# Altium PCB PCB1.PcbDoc
Units mil, origin at the board's own origin, x right, y up, seen from the top; angles counter-clockwise.
Board outline 6000 x 4000 mil, 2 copper layers (Top Layer, Bottom Layer); 54 components, 62 nets, 232 pads, 0 vias.
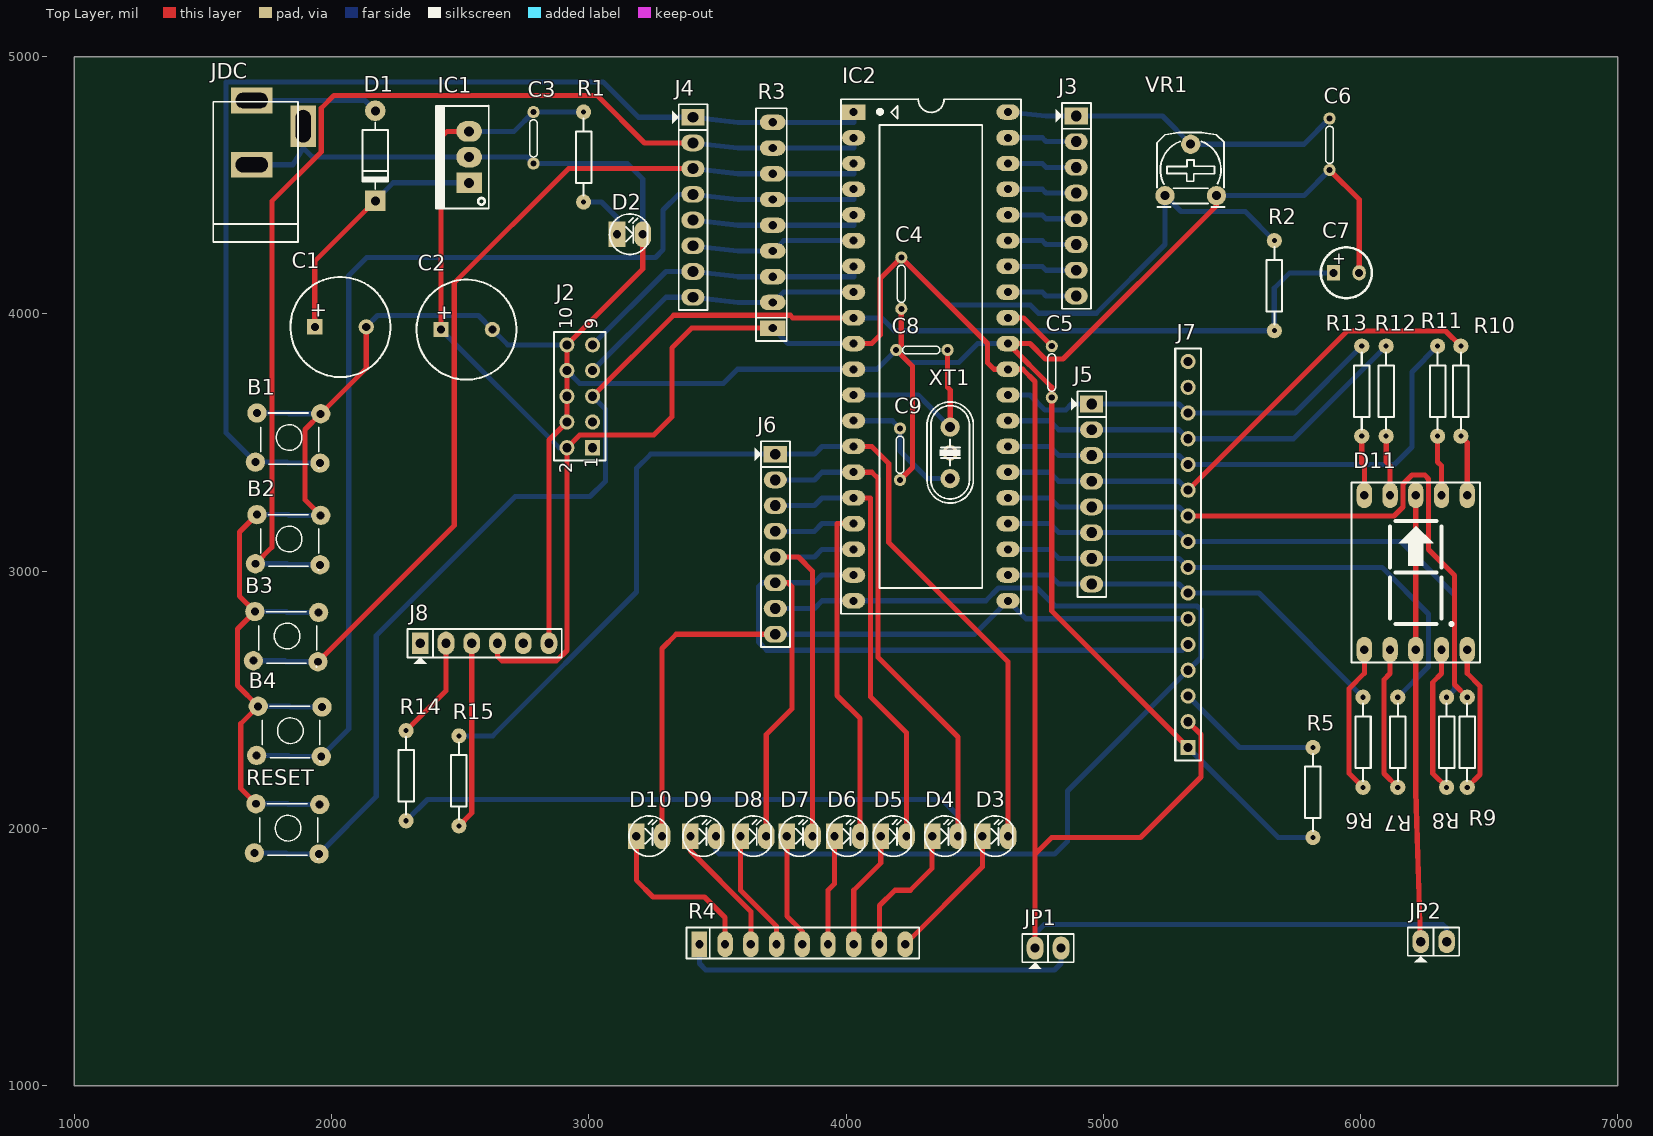
[diagram p0: Top Layer view]
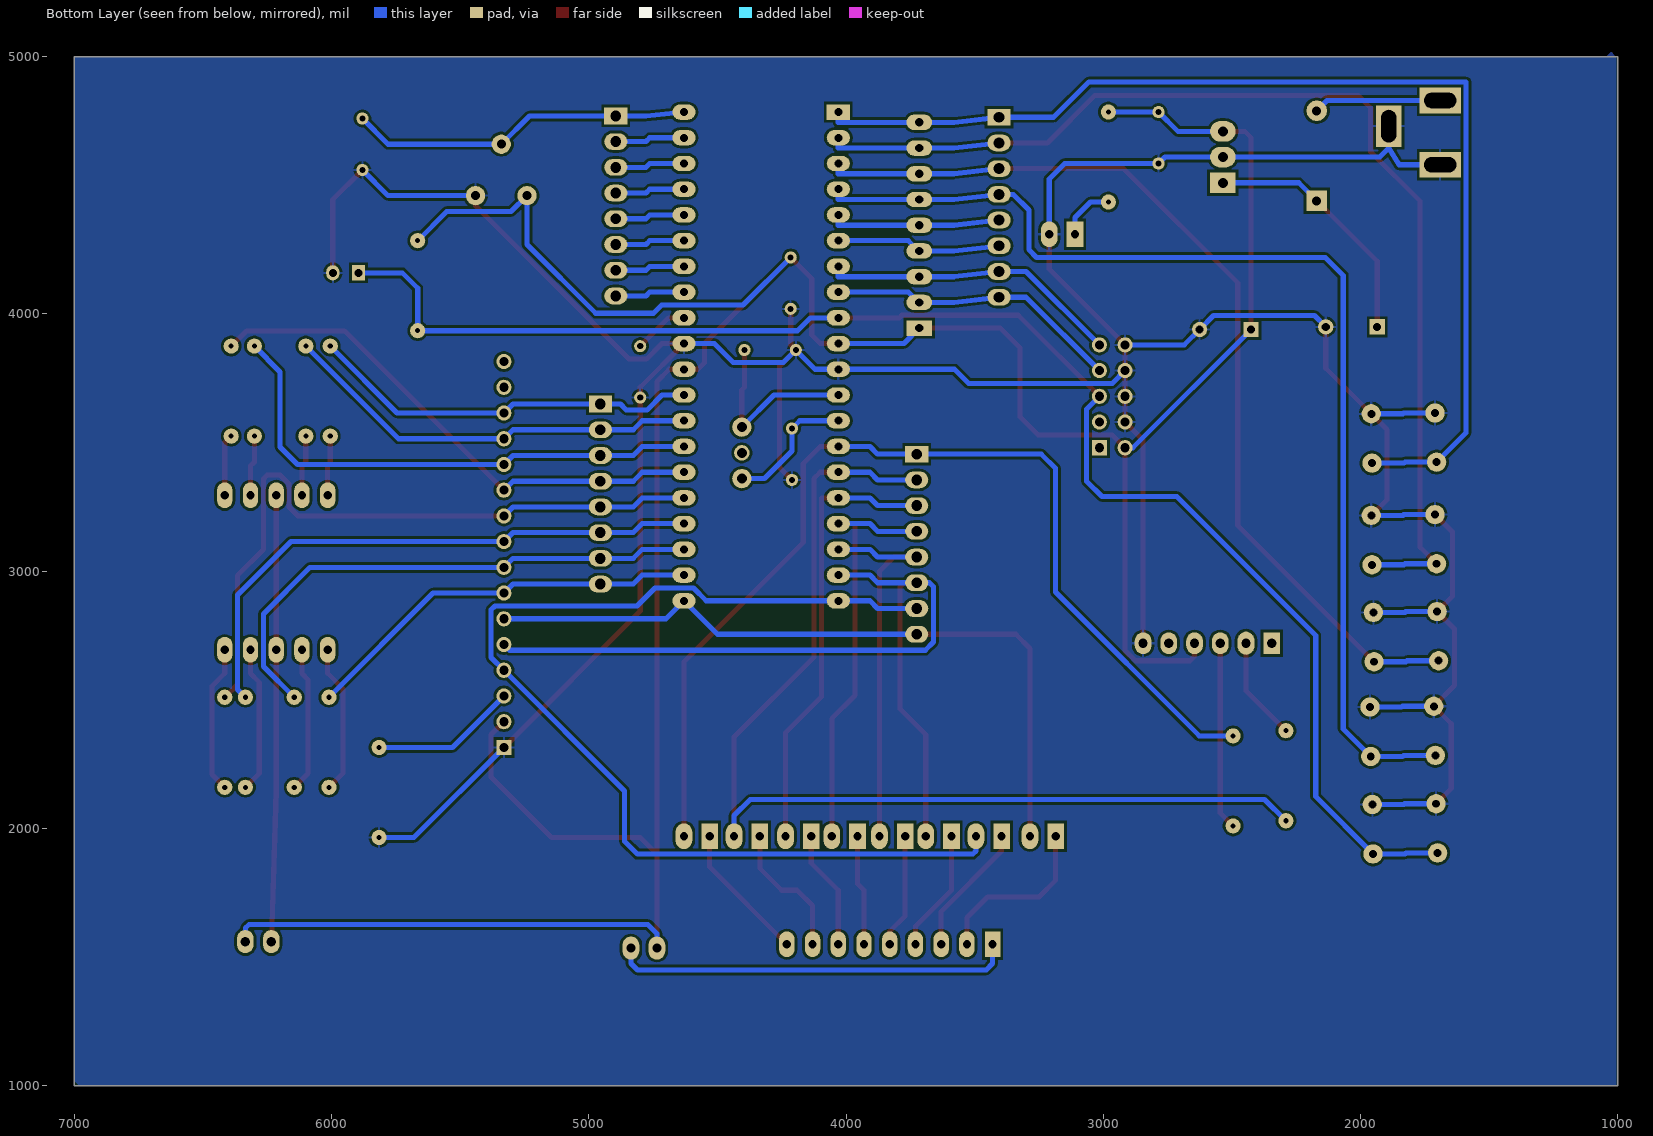
[diagram p1: Bottom Layer view, seen from below]
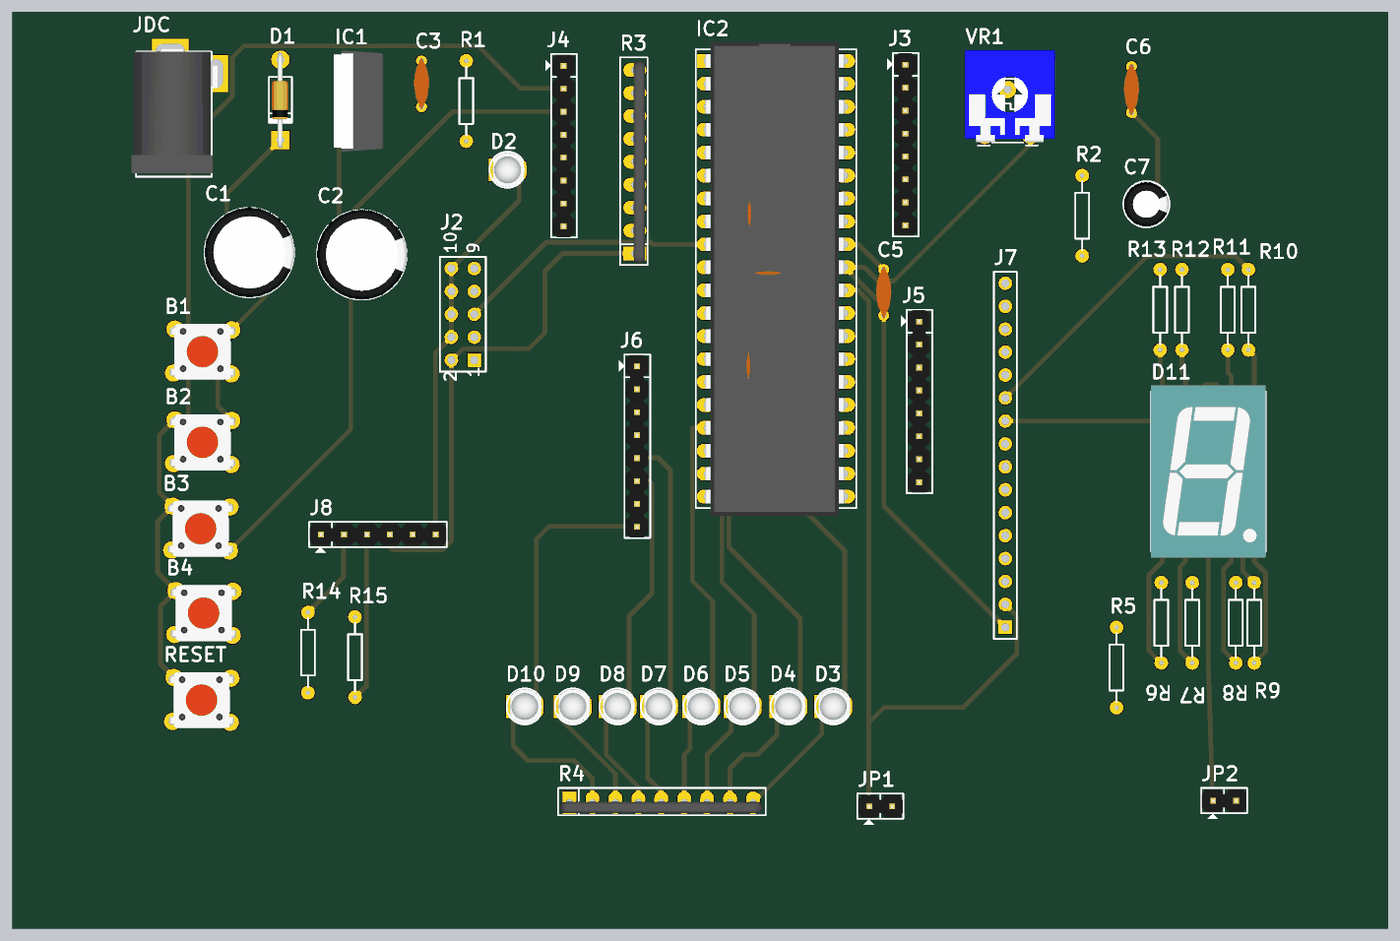
[diagram p2: 3D render of the assembled board from above, using the file's embedded part models]

## Layer stack, top to bottom
Top Solder: solder mask 0.4, Solder Resist, Dk 3.5
Top Layer: signal copper 1.4
Dielectric 1: dielectric 12.6, FR-4, Dk 4.8
Bottom Layer: signal copper 1.4
Bottom Solder: solder mask 0.4, Solder Resist, Dk 3.5

## Board outline
1000,1000 7000,1000 7000,5000 1000,5000

## Design rules (kind name [scope] priority, off if disabled: settings)
Clearance [All] p1: gap=10 ignorepadtopadclearanceinfootprint=FALSE except(0: Arc-Hole Track-Hole SMDPad-Hole THPad-Hole Via-Hole Fill-Hole Poly-Hole Region-Hole Text-Hole)
PolygonConnect [All] p1: connectstyle=Relief reliefconductorwidth=10 reliefentries=4 polygonreliefangle="90 Angle" airgapwidth=10
RoomDefinition mach_nguyen_ly [InComponentClass('mach_nguyen_ly')] p1: confinementstyle=ConfineIn formatcopy=TRUE lockcomponents=FALSE outline 7045,1060 20675,1060 20675,3240 7045,3240
RoutingVias [All] p1: holewidth=28 width=50 viastyle="Through Hole" minholewidth=28 minwidth=50 maxholewidth=28 maxwidth=50
SolderMaskExpansion [All] p1: expansion=4 istentingtop=FALSE
Width [All] p1: maxlimit=30 minlimit=15 preferedwidth=20
30 further rules are at their usual default settings.

## Components (designator, comment, footprint, x,y, rotation, side; value= is the part's Value field where it differs from the comment)
B1 "SW" SW4 1710,3615 r0 top value="Button chip 4 pin"
B2 "SW" SW4 1710,3220 r0 top value="Button chip 4 pin"
B3 "SW" SW4 1702,2843 r0 top value="Button chip 4 pin"
B4 "SW" SW4 1715,2475 r0 top value="Button chip 4 pin"
C1 "1000uF" C10mm 2035,3950 r0 top
C2 "1000uF" C10mm 2525,3940 r0 top
C3 "Capacitor Ceramic" Tu-ceramic 2785,4585 r90 top value=100n
C4 "Capacitor Ceramic" Tu-ceramic 4215,4020 r90 top value=100n
C5 "Capacitor Ceramic" Tu-ceramic 4800,3675 r90 top value=100n
C6 "Capacitor Ceramic" Tu-ceramic 5880,4560 r90 top value=100n
C7 "10u" C5mm 5945,4160 r0 top
C8 "Capacitor Ceramic" Tu-ceramic 4195,3860 r0 top value=22p
C9 "Capacitor Ceramic" Tu-ceramic 4210,3355 r90 top value=22p
D1 "1N4007" D1A 2170,4790 r90 top
D2 "LED 5mm" LED-3 3110,4310 r0 top value="LED 3 ly Single Colour"
D3 "LED 5mm" LED-3 4530,1970 r0 top value="LED 3 ly Single Colour"
D4 "LED 5mm" LED-3 4335,1970 r0 top value="LED 3 ly Single Colour"
D5 "LED 5mm" LED-3 4135,1970 r0 top value="LED 3 ly Single Colour"
D6 "LED 5mm" LED-3 3955,1970 r0 top value="LED 3 ly Single Colour"
D7 "LED 5mm" LED-3 3770,1970 r0 top value="LED 3 ly Single Colour"
D8 "LED 5mm" LED-3 3590,1970 r0 top value="LED 3 ly Single Colour"
D9 "LED 5mm" LED-3 3395,1970 r0 top value="LED 3 ly Single Colour"
D10 "LED 5mm" LED-3 3185,1970 r0 top value="LED 3 ly Single Colour"
D11 "7SEG S" 7SEGS 6015,2695 r0 top value="LED 7S SEG"
IC1 "LM7805" QTO-220 2535,4510 r90 top
IC2 "ATMEL 16L" DIP40/W0.6 4030,4785 r270 top value="Atmega 16L"
J2 "Header 5X2" HDR2X5 3015,3480 r90 top
J3 "PA" JP8 4895,4770 r270 top value=JP7
J4 "PB" JP8 3405,4765 r270 top value=JP7
J5 "PC" JP8 4955,3650 r270 top value=JP7
J6 "PD" JP8 3725,3455 r270 top value=JP7
J7 "Header 16" HDR1X16 5330,2315 r90 top
J8 "UART_USB" JP6 2345,2720 r0 top value=JP7
JDC "Jac DC" DC-IN 1790,4705 r90 top
JP1 "Jumper 2" JP2 4735,1535 r0 top value="JP 2"
JP2 "Jumper 2" JP2 6234,1560 r0 top value="JP 2"
R1 "1K" R1/6W 2980,4610 r90 top value="R1/4W - 1K"
R2 "10K" R1/6W 5665,4110 r90 top value="R1/4W - 1K"
R3 "10K" RN8 3715,3945 r90 top value="Tro thanh 10K"
R4 "1K" RN8 3430,1550 r0 top value="Tro thanh 10K"
R5 "1K" R1/6W 5815,2140 r90 top value="R1/4W - 1K"
R6 "1k" R1/6W 6010,2335 r270 top value="R1/4W - 1K"
R7 "1k" R1/6W 6145,2335 r270 top value="R1/4W - 1K"
R8 "1k" R1/6W 6335,2335 r270 top value="R1/4W - 1K"
R9 "1k" R1/6W 6415,2335 r270 top value="R1/4W - 1K"
R10 "1k" R1/6W 6390,3700 r270 top value="R1/4W - 1K" (schematic designator 10)
R11 "1k" R1/6W 6300,3700 r270 top value="R1/4W - 1K"
R12 "1k" R1/6W 6100,3700 r270 top value="R1/4W - 1K"
R13 "1k" R1/6W 6005,3700 r270 top value="R1/4W - 1K"
R14 "100R" R1/6W 2290,2205 r90 top value="R1/4W - 1K"
R15 "100R" R1/6W 2495,2185 r270 top value="R1/4W - 1K"
RESET "SW" SW4 1706,2096 r0 top value="Button chip 4 pin"
VR1 "10K" VR 5240,4460 r0 top value="VR 10K"
XT1 "8Mhz" XT2 4405,3460 r270 top value=4Mhz

## Footprints (in the part's own frame and the unit in brackets; to place one, negate y for a bottom-side part, rotate by r counter-clockwise, add the part's x,y. Pads: shape width x height; smd on the part's side, far side on the other; paste and mask are expansions set on the pad)
7SEGS [mil] "DIP 10 Leads; Body 12 x 15 mm; Pitch 0.5 mm"
  oval 60x100 hole 32: 1(0,0) 2(100,0) 3(200,0) 4(300,0) 5(400,0) 6(400,600) 7(300,600) 8(200,600) 9(100,600) 10(0,600)
  silkscreen extent -50,-50 450,650, body extent -50,-75 450,675, height 316
C5mm [mm]
  rect 1.3x1.5 hole 0.8: 1(-1.27,0)
  oval 1.3x1.5 hole 0.8: 2(1.27,0)
  silkscreen extent -2.51,-2.51 2.51,2.51, body extent -2.5,-2.5 2.49,2.5, height 11.01
C10mm [mm]
  rect 1.5x1.5 hole 0.8: 1(-2.54,0)
  round 1.5 hole 0.8: 2(2.54,0)
  silkscreen extent -4.95,-4.96 4.93,4.92, body extent -5,-5 4.97,5, height 20.01
D1A [mil] "Diode 1A, W 100mil, L 350mil"
  round 80 hole 35: 1(0,0)
  rect 80x80 hole 35: 2(-350,0)
  silkscreen extent -305,-50 -45,50, body extent -386,-33 34,36, height 84
DC-IN [mil] "Jac DC input"
  rect 100x160 hole 59.06 slot 125.98 at 90 deg: 1(125,100) 2(-125,100)
  rect 160x100 hole 59.06 slot 125.98 at 0 deg: 3(25,-100)
  silkscreen extent -425,-80 120,250, body extent -410,-105 134,269, height 434
DIP40/W0.6 [mil] "40 PIN, W 600mil, Pin to pin 100mil"
  rect 60x90 hole 31: 1(0,0)
  oval 60x90 hole 31: 2(100,0) 3(200,0) 4(300,0) 5(400,0) 6(500,0) 7(600,0) 8(700,0) 9(800,0) 10(900,0) 11(1000,0) 12(1100,0) 13(1200,0) 14(1300,0) 15(1400,0) 16(1500,0) 17(1600,0) 18(1700,0) 19(1800,0) 20(1900,0) 21(1900,600) 22(1800,600) 23(1700,600) 24(1600,600) 25(1500,600) 26(1400,600) 27(1300,600) 28(1200,600) 29(1100,600) 30(1000,600) 31(900,600) 32(800,600) 33(700,600) 34(600,600) 35(500,600) 36(400,600) 37(300,600) 38(200,600) 39(100,600) 40(0,600)
  silkscreen extent -50,-50 1950,650, body extent -82,-10 1982,600, height 224
HDR1X16 [mm] "Connector; Header; 16 Position"
  rect 1.5x1.5 hole 0.9: 1(0,0)
  round 1.5 hole 0.9: 2(2.54,0) 3(5.08,0) 4(7.62,0) 5(10.16,0) 6(12.7,0) 7(15.24,0) 8(17.78,0) 9(20.32,0) 10(22.86,0) 11(25.4,0) 12(27.94,0) 13(30.48,0) 14(33.02,0) 15(35.56,0) 16(38.1,0)
  silkscreen extent -1.27,-1.27 39.37,1.27
HDR2X5 [mm] "Connector; Header; 5x2 Position"
  rect 1.5x1.5 hole 0.9: 1(0,0)
  round 1.5 hole 0.9: 2(0,2.54) 3(2.54,0) 4(2.54,2.54) 5(5.08,0) 6(5.08,2.54) 7(7.62,0) 8(7.62,2.54) 9(10.16,0) 10(10.16,2.54)
  silkscreen extent -1.27,-1.27 11.43,3.81
JP2 [mil]
  oval 65x90 hole 36: 1(0,0) 2(101,0)
  silkscreen extent -50,-81 150,55, body extent -48,-50 148,48, height 354
JP6 [mil] "JP6"
  rect 65x85 hole 36: 1(0,0)
  oval 65x90 hole 36: 2(100,0)
  oval 65x85 hole 36: 3(200,0) 4(300,0) 5(400,0) 6(500,0)
  silkscreen extent -50,-80 550,55, body extent -48,-50 548,48, height 354
JP8 [mil] "JP8"
  rect 65x90 hole 42: 1(0,0)
  oval 65x90 hole 42: 2(100,0) 3(200,0) 4(300,0) 5(400,0) 6(500,0) 7(600,0) 8(700,0)
  silkscreen extent -50,-80 750,57, body extent -48,-50 748,48, height 354
LED-3 [mil] "LED 2 PIN, 3ly Only colour"
  rect 65x100 hole 32: 1(0,0)
  oval 65x100 hole 32: 2(100,0)
  silkscreen extent -29,-78 118,79, body extent -13,-75 125,75, height 217
QTO-220 [mil] "TO-220 - 1-2-3"
  rect 80x100 hole 39: 1(0,0)
  oval 80x100 hole 39: 2(100,0) 3(200,0)
  silkscreen extent -100,-76 300,130, body extent -121,-85 321,100, height 755
R1/6W [mm]
  round 1.5 hole 0.5: 1(-4.445,0) 2(4.445,0)
  silkscreen extent -3.81,-0.76 3.81,0.76
RN8 [mil] "R SIP8, 9 Pin"
  rect 60x100 hole 32: 1(0,0)
  oval 60x100 hole 32: 2(100,0) 3(200,0) 4(300,0) 5(400,0) 6(500,0) 7(600,0) 8(700,0) 9(800,0)
  silkscreen extent -50,-55 855,65, body extent -43,-44 843,5, height 259
SW4 [mil] "SW button 4pin, 250 x250 mil"
  round 75 hole 31: 1(0,0) 2(245,-195) 3(248,-3) 4(-6,-191)
  silkscreen extent 15,-215 240,0, body extent -36,-220 276,24, height 276
Tu-ceramic [mm] "Tu gom mini"
  round 1.2 hole 0.6: 1(0,0) 2(5.08,0)
  silkscreen extent 0.64,-0.38 4.32,0.38, body extent -0.38,-0.85 5.46,0.85, height 6.12
VR [mil] "Resistor Variable"
  round 75 hole 35: 1(0,0) 2(100,200) 3(200,0)
  silkscreen extent -31,-44 231,246, body extent -87,-30 307,372, height 165
XT2 [mm] "Footpin for Crystal 2 pin"
  round 1.524 hole 1: 0(0,0)
  round 1.905 hole 1: 1(-2.54,0) 2(2.54,0)
  silkscreen extent -5.03,-2.29 4.96,2.29, body extent -5.93,-2.36 5.42,2.29, height 3.5

## Part data
B1 B2 B3 B4 RESET: library part SW4, "Switch button 4 pin"
C1 C2: library part "Cap Pol 12mm", "Polarized Capacitor (Axial)", LatestRevisionDate=17-Jul-2002, LatestRevisionNote="Re-released for DXP Platform.", PackageReference=POLAR0.8, Published=8-Jun-2000, Publisher="Altium Limited"
C3 C4 C5 C6 C8 C9: library part CapDecop, "Capacitor", LatestRevisionDate=17-Jul-2002, LatestRevisionNote="Re-released for DXP Platform.", PackageReference=RAD-0.3, Published=8-Jun-2000, Publisher="Altium Limited"
C7: library part "Cap Pol 5mm", "Polarized Capacitor (Axial)", LatestRevisionDate=17-Jul-2002, LatestRevisionNote="Re-released for DXP Platform.", PackageReference=POLAR0.8, Published=8-Jun-2000, Publisher="Altium Limited"
D1: library part D1A, "Diode 1A"
D2 D3 D4 D5 D6 D7 D8 D9 D10: library part LED, "LED Single colour Green and Red"
D11: library part LED7S, "Single 7 Seg Dipslay"
IC1: library part LM78xx, "On ap +, from + 5 to + 24VDC"
IC2: library part Atmega16L, "8-Bit AVR Microcontroller with 16K Bytes of In-System Programmable Flash Memory"
J2: "Header, 5-Pin, Dual row", LatestRevisionDate=17-Jul-2002, LatestRevisionNote="Re-released for DXP Platform.", Publisher="Altium Limited"
J3 J4 J5 J6: library part JP8, "JP8 PIN"
J7: "Header, 16-Pin", LatestRevisionDate=17-Jul-2002, LatestRevisionNote="Re-released for DXP Platform.", Publisher="Altium Limited"
J8: library part JP6_1, "JP6 PIN"
JDC: library part DCIN, "Jac DC input"
JP1 JP2: library part "JP 2"
R1 R2 R5 R6 R7 R8 R9 R10 R11 R12 R13 R14 R15: library part Res, "Resistor 1/4W"
R3 R4: library part ResN8, "Resistor 8 (Thanh)"
VR1: library part VR1, "Var Resistor"
XT1: library part XT2, "Crystal For all Crystal 2pin."

## Nets (pads, with @x,y where several pads share a name; then routed paths per layer and width w, separated by ;. In a path a pad name is that pad's centre, name@x,y a point inside that pad or via, vN(x,y) a via of type N, cw(c..) or ccw(c..) an arc to the next point about the centre after c; other vN are vias at no path point)
AVR_RX: D3.2 IC2.14 J6.1 R15.1 | length 4087.3
  Top Layer w20: IC2.14 4100,3485 4166,3419 4166,3112 4630,2648 D3.2
  Bottom Layer w20: R15.1 2627,2360 3186,2919 3186,3400 3241,3455 J6.1 3877,3455 3907,3485 IC2.14
AVR_TX: D4.2 IC2.15 J6.2 R14.1 | length 4226.7
  Top Layer w20: IC2.15 4100,3385 4125,3360 4125,2665 4435,2355 D4.2
  Bottom Layer w20: R14.1 2373,2113 4372,2113 4435,2050 D4.2 ; J6.2 3877,3355 3907,3385 IC2.15
FT_RX: J8.2 R14.2 | length 404.2
  Top Layer w20: R14.2 2445,2535 J8.2
FT_TX: J8.3 R15.2 | length 730.7
  Top Layer w20: R15.2 2545,2060 J8.3
GND: B1.1 B1.3 B2.1 B2.3 B3.1 B3.3 B4.1 B4.3 C1.2 C2.2 C3.1 C4.1 C5.1 C6.1 C7.2 C8.1 C9.1 D2.2 IC1.2 IC2.11 IC2.31 J2.4 J2.6 J2.8 J2.10 J7.1 J8.6 JDC.2 JDC.3 R5.1 RESET.1 RESET.3 VR1.3 | length 14985.7
  Top Layer w20: RESET.1 1647,2155 1647,2407 B4.1 1634,2556 1634,2775 B3.1 1642,2903 1642,3152 B2.1 ; B2.3 1897,3278 1897,3551 B1.3 2135,3789 C1.2 ; J8.6 2845,3510 J2.4 J2.6 J2.8 J2.10 3210,4175 D2.2 ; C9.1 4258,3403 4258,3797 C8.1 4215,3880 C4.1 ; J7.1 4800,2845 C5.1 4800,3715 IC2.31 4715,3885 4775,3825 4844,3825 5440,4421 VR1.3 ; C6.1 5995,4445 C7.2
  Bottom Layer w20: JDC.2 1850,4580 1890,4645 ; B3.1 1824,2843 1827,2840 B3.3 ; RESET.1 1828,2096 1831,2093 RESET.3 ; B2.1 1832,3220 1835,3217 B2.3 ; B1.1 1832,3615 1835,3612 B1.3 ; B4.1 1837,2475 1840,2472 B4.3 ; JDC.3 1890,4645 ; C1.2 2179,3994 2571,3994 C2.2 2685,3880 J2.10 ; J2.8 2965,3730 3523,3730 3578,3785 IC2.11 4120,3785 C8.1 4243,3812 4439,3812 4512,3885 IC2.31 ; D2.2 3210,4525 3150,4585 C3.1 2760,4610 IC1.2 1925,4610 1890,4645 ; J7.1 5680,1965 R5.1 ; VR1.3 5780,4460 C6.1
MISO: IC2.7 J2.9 J4.7 R3.3 | length 1174.2
  Bottom Layer w20: J2.9 3300,4165 J4.7 3580,4145 R3.3 4030,4145 IC2.7
MOSI: IC2.6 J4.6 R3.4 | length 642.7
  Bottom Layer w20: J4.6 3580,4245 R3.4 3718,4245 3758,4285 IC2.6
Net10_2: D11.6 R10.2 | length 240.4
  Top Layer w20: R10.2 6415,3500 D11.6
NetC1_1: C1.1 D1.2 IC1.1 | length 981.3
  Top Layer w20: C1.1 1935,4205 D1.2
  Bottom Layer w20: D1.2 2240,4510 IC1.1
NetC5_2: C5.2 IC2.32 | length 215.6
  Top Layer w20: IC2.32 4690,3985 C5.2
NetC8_2: C8.2 IC2.12 XT1.1 | length 730.9
  Top Layer w20: C8.2 4395,3715 4405,3705 XT1.1
  Bottom Layer w20: IC2.12 4280,3685 XT1.1
NetC9_2: C9.2 IC2.13 XT1.2 | length 519.7
  Bottom Layer w20: IC2.13 4180,3585 C9.2 4210,3467 4317,3360 XT1.2
NetD1_1: D1.1 JDC.1 | length 496.6
  Bottom Layer w20: JDC.1 2130,4830 D1.1
NetD2_1: D2.1 R1.1 | length 219.9
  Bottom Layer w20: R1.1 3050,4435 3110,4375 D2.1
NetD3_1: D3.1 R4.9 | length 544.3
  Top Layer w20: R4.9 4530,1850 D3.1
NetD4_1: D4.1 R4.8 | length 540.1
  Top Layer w20: R4.8 4130,1700 4190,1760 4250,1760 4335,1845 D4.1
NetD5_1: D5.1 R4.7 | length 463.5
  Top Layer w20: R4.7 4030,1760 4135,1865 D5.1
NetD6_1: D6.1 R4.6 | length 430.4
  Top Layer w20: R4.6 3930,1760 3955,1785 D6.1
NetD7_1: D7.1 R4.5 | length 444.9
  Top Layer w20: D7.1 3770,1660 3830,1600 R4.5
NetD8_1: D8.1 R4.4 | length 478
  Top Layer w20: D8.1 3590,1760 3730,1620 R4.4
NetD9_1: D9.1 R4.3 | length 517.3
  Top Layer w20: D9.1 3395,1912 3630,1677 R4.3
NetD10_1: D10.1 R4.2 | length 680.1
  Top Layer w20: D10.1 3185,1799 3250,1734 3450,1734 3530,1654 R4.2
NetD11_1: D11.1 R6.2 | length 581.8
  Top Layer w20: R6.2 5956,2214 5956,2544 6015,2603 D11.1
NetD11_2: D11.2 R7.2 | length 567.3
  Top Layer w20: D11.2 6115,2602 6091,2578 6091,2214 R7.2
NetD11_3: D11.3 D11.8 JP2.1 | length 1735.3
  Top Layer w20: D11.8 D11.3 6215,2147 JP2.1
NetD11_4: D11.4 R8.2 | length 571.5
  Top Layer w20: D11.4 6315,2602 6281,2568 6281,2214 R8.2
NetD11_5: D11.5 R9.2 | length 576.4
  Top Layer w20: R9.2 6465,2210 6465,2553 6415,2603 D11.5
NetD11_7: D11.7 R11.2 | length 236.2
  Top Layer w20: R11.2 6300,3425 6315,3410 D11.7
NetD11_9: D11.9 R12.2 | length 236.2
  Top Layer w20: R12.2 6100,3425 6115,3410 D11.9
NetD11_10: D11.10 R13.2 | length 234.1
  Top Layer w20: R13.2 6005,3420 6015,3410 D11.10
NetJ7_3: J7.3 R5.2 | length 567.8
  Bottom Layer w20: J7.3 5530,2315 R5.2
NetJP1_2: JP1.2 R4.1 | length 1561.7
  Bottom Layer w20: R4.1 3430,1475 3455,1450 4811,1450 4836,1475 JP1.2
PA0: C6.2 IC2.40 J3.1 VR1.2 | length 1337.7
  Bottom Layer w20: IC2.40 4778,4770 J3.1 5230,4770 VR1.2 5780,4660 C6.2
PA1: IC2.39 J3.2 | length 271.2
  Bottom Layer w20: IC2.39 4763,4685 4778,4670 J3.2
PA2: IC2.38 J3.3 | length 271.2
  Bottom Layer w20: IC2.38 4763,4585 4778,4570 J3.3
PA3: IC2.37 J3.4 | length 271.2
  Bottom Layer w20: IC2.37 4763,4485 4778,4470 J3.4
PA4: IC2.36 J3.5 | length 271.2
  Bottom Layer w20: IC2.36 4763,4385 4778,4370 J3.5
PA5: IC2.35 J3.6 | length 271.2
  Bottom Layer w20: IC2.35 4763,4285 4778,4270 J3.6
PA6: IC2.34 J3.7 | length 271.2
  Bottom Layer w20: IC2.34 4763,4185 4778,4170 J3.7
PA7: IC2.33 J3.8 | length 271.2
  Bottom Layer w20: IC2.33 4763,4085 4778,4070 J3.8
PB0: B1.2 B1.4 IC2.1 J4.1 R3.9 | length 4315.8
  Bottom Layer w20: B1.2 1831,3420 1827,3424 B1.4 1590,3538 1590,4902 3056,4902 3193,4765 J4.1 3580,4745 R3.9 4030,4745 IC2.1
PB1: B2.2 B2.4 IC2.2 J4.2 R3.8 | length 4338.2
  Top Layer w20: B2.4 1768,3093 1768,4438 1960,4630 1960,4800 2010,4850 3032,4850 3217,4665 J4.2
  Bottom Layer w20: B2.4 1827,3029 1831,3025 B2.2 ; J4.2 3580,4645 R3.8 4030,4645 IC2.2
PB2: B3.2 B3.4 IC2.3 J4.3 R3.7 | length 3723.2
  Top Layer w20: B3.2 2477,3178 2477,4121 2921,4565 J4.3
  Bottom Layer w20: B3.4 1819,2652 1823,2648 B3.2 ; J4.3 3580,4545 R3.7 4030,4545 IC2.3
PB3: B4.2 B4.4 IC2.4 J4.4 R3.6 | length 4391.8
  Bottom Layer w20: B4.4 1832,2284 1836,2280 B4.2 2067,2387 2067,4150 2137,4220 3259,4220 3289,4250 3289,4404 3350,4465 J4.4 3580,4445 R3.6 4030,4445 IC2.4
PB4: IC2.5 J4.5 R3.5 | length 666.1
  Bottom Layer w20: J4.5 3580,4345 R3.5 4030,4345 IC2.5
PC0: IC2.22 J5.8 J7.7 R6.1 | length 1576.8
  Bottom Layer w20: IC2.22 4792,2985 4827,2950 J5.8 5295,2950 J7.7 5605,2915 R6.1
PC1: IC2.23 J5.7 J7.8 R7.1 | length 2112.7
  Bottom Layer w20: IC2.23 4792,3085 4827,3050 J5.7 5295,3050 J7.8 6084,3015 6265,2834 6265,2630 R7.1
PC2: IC2.24 J5.6 J7.9 R8.1 | length 2260.2
  Bottom Layer w20: IC2.24 4792,3185 4827,3150 J5.6 5295,3150 J7.9 6158,3115 6365,2908 6365,2540 R8.1
PC3: IC2.25 J5.5 J7.10 R9.1 | length 2699.3
  Top Layer w20: J7.10 6130,3215 6165,3250 6165,3339 6200,3374 6250,3374 6265,3359 6265,3084 6365,2984 6365,2560 R9.1
  Bottom Layer w20: IC2.25 4792,3285 4827,3250 J5.5 5295,3250 J7.10
PC4: IC2.26 J5.4 J7.11 R10.1 | length 2069.8
  Top Layer w20: J7.11 5949,3934 6331,3934 R10.1
  Bottom Layer w20: IC2.26 4792,3385 4827,3350 J5.4 5295,3350 J7.11
PC5: IC2.27 J5.3 J7.12 R11.1 | length 2060.6
  Bottom Layer w20: IC2.27 4792,3485 4827,3450 J5.3 5295,3450 J7.12 6132,3415 6200,3483 6200,3775 R11.1
PC6: IC2.28 J5.2 J7.13 R12.1 | length 1648.1
  Bottom Layer w20: IC2.28 4792,3585 4827,3550 J5.2 5295,3550 J7.13 5740,3515 R12.1
PC7: IC2.29 J5.1 J7.14 R13.1 | length 1530.7
  Bottom Layer w20: IC2.29 4715,3685 4773,3627 4854,3627 4877,3650 J5.1 5295,3650 J7.14 5745,3615 R13.1
PD2: D5.2 IC2.16 J6.3 | length 1755.4
  Top Layer w20: IC2.16 4095,3285 4095,2512 4235,2372 D5.2
  Bottom Layer w20: J6.3 3877,3255 3907,3285 IC2.16
PD3: D6.2 IC2.17 J6.4 | length 1634.7
  Top Layer w20: IC2.17 3965,3185 3965,2517 4055,2427 D6.2
  Bottom Layer w20: J6.4 3877,3155 3907,3185 IC2.17
PD4: D7.2 IC2.18 J6.5 | length 1515.2
  Top Layer w20: J6.5 3815,3055 3870,3000 D7.2
  Bottom Layer w20: J6.5 3877,3055 3907,3085 IC2.18
PD5: D8.2 IC2.19 J6.6 J7.5 | length 3378.6
  Top Layer w20: D8.2 3690,2365 3790,2465 3790,2940 3775,2955 J6.6
  Bottom Layer w20: IC2.19 3907,2985 3877,2955 J6.6 3675,2955 3660,2940 3660,2725 3692,2693 5308,2693 J7.5
PD6: D9.2 IC2.20 J6.7 J7.4 | length 4287.7
  Bottom Layer w20: D9.2 3495,1912.5 3507.5,1900 4811,1900 4861,1950 4861,2146 J7.4 5380,2665 5380,2850 5365,2865 4813,2865 4743,2935 4593,2935 4543,2885 IC2.20 3907,2885 3877,2855 J6.7
PD7: D10.2 IC2.21 J6.8 J7.6 | length 2880.6
  Top Layer w20: D10.2 3285,2700 3340,2755 J6.8
  Bottom Layer w20: J6.8 4500,2755 IC2.21 4700,2815 J7.6
RESET: C7.1 IC2.9 J2.5 R2.1 RESET.2 RESET.4 | length 5909.4
  Top Layer w20: J2.5 3330,3995 3783,3995 3793,3985 IC2.9
  Bottom Layer w20: RESET.4 1823,1905 1827,1901 RESET.2 2174,2124 2174,2750 2714,3290 3005,3290 3065,3350 3065,3630 J2.5 ; IC2.9 4138,3985 4188,3935 R2.1 5665,4100 5725,4160 C7.1
SCK: IC2.8 J2.7 J4.8 R3.2 | length 1150.8
  Bottom Layer w20: J2.7 3300,4065 J4.8 3580,4045 R3.2 3718,4045 3758,4085 IC2.8
VCC: C2.1 C3.2 C4.2 IC1.3 IC2.10 IC2.30 J2.2 J7.2 J8.4 JP1.1 JP2.2 R1.2 R2.2 R3.1 VR1.1 | length 12708.9
  Top Layer w20: C2.1 2425,4685 2450,4710 IC1.3 ; J8.4 2645,2669.5 2662.5,2652 2875,2652 2915,2692 J2.2 2965,3530 3253,3530 3323,3600 3323,3868 3400,3945 R3.1 ; IC2.10 4100,3885 4133,3918 4133,4138 C4.2 4550,3885 4550,3810 4575,3785 IC2.30 4687,3785 4735,3737 4735,1900 ; JP1.1 4735,1900 ; J7.2 5380,2365 5380,2200 5145,1965 4800,1965 4735,1900
  Bottom Layer w20: C2.1 2885,3480 J2.2 ; IC1.3 2710,4710 C3.2 R1.2 ; R3.1 3775,3885 IC2.10 ; C4.2 4400,4035 4716,4035 4748,4003 4973,4003 5240,4270 VR1.1 5302,4398 5552,4398 R2.2 ; JP1.1 4735,1591 4770,1626 6321.5,1626 6335,1612.5 JP2.2
pads on no net: J2.1 J2.3 J7.15 J7.16 J8.1 J8.5 XT1.0

## Polygon pours and split planes (outlines as drawn)
GND on Bottom Layer "GND_L02_P000" (solid, remove dead copper, pour order 0): 1010,5000 1005,4995 1005,1000 6980,1000 7000,1020 7000,5000 1045,5000 1025,5020

## Text inside footprints (layer, text, board x,y; h text height)
C1: Top Overlay "+" at 1915,3990 h60
C2: Top Overlay "+" at 2405,3980 h60
C7: Top Overlay "+" at 5890,4193 h47.24
J2: Top Overlay "10" at 2935,3940 h50 r90; Top Overlay "9" at 3035,3940 h50 r90; Top Overlay "1" at 3035,3400 h50 r90; Top Overlay "2" at 2935,3380 h50 r90